# Altium PCB PCB3.PcbDoc
Units mil, origin at the board's own origin, x right, y up, seen from the top; angles counter-clockwise.
Board outline 3080 x 3661.42 mil, 2 copper layers (Top Layer, Bottom Layer); 33 components, 39 nets, 131 pads, 39 vias.
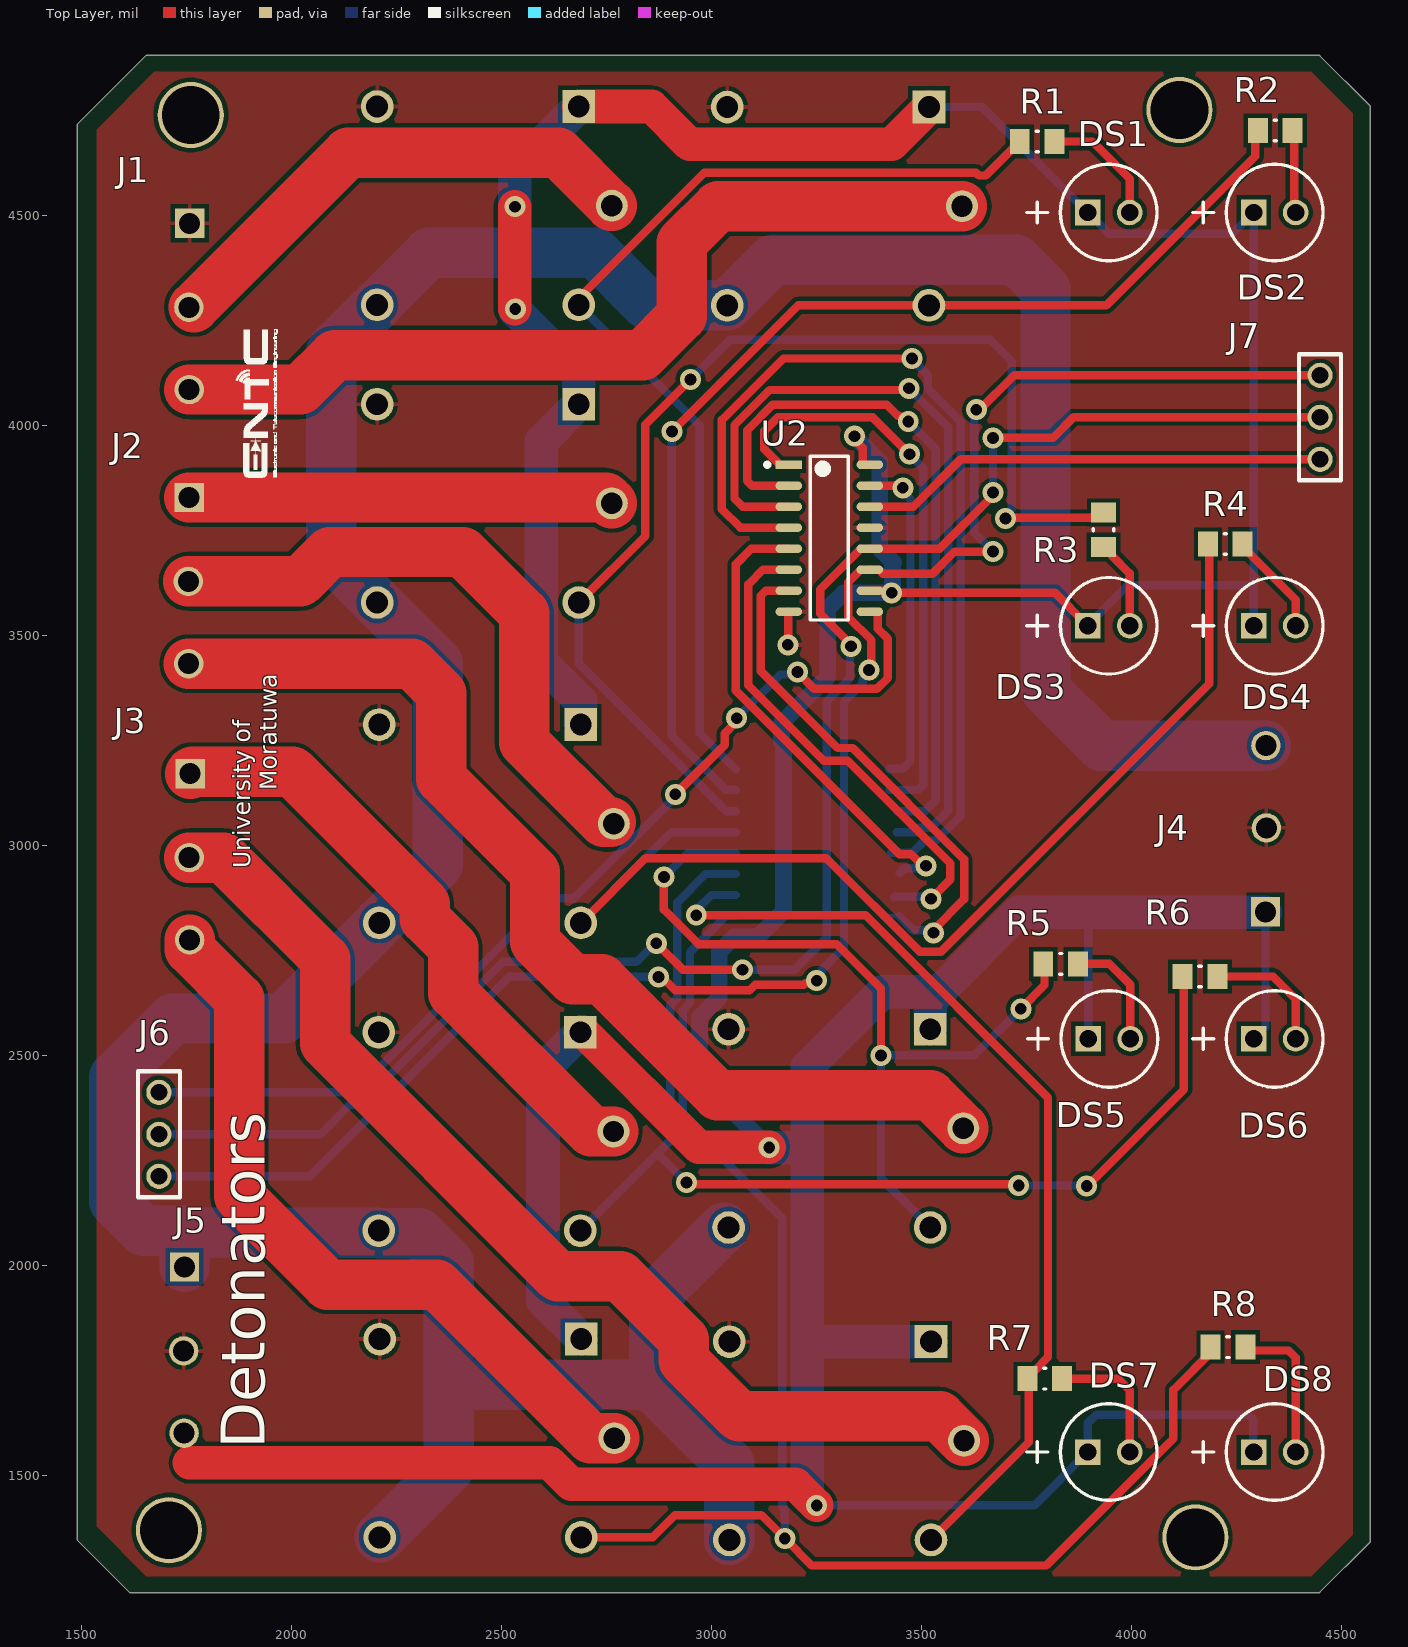
[diagram p0: Top Layer view]
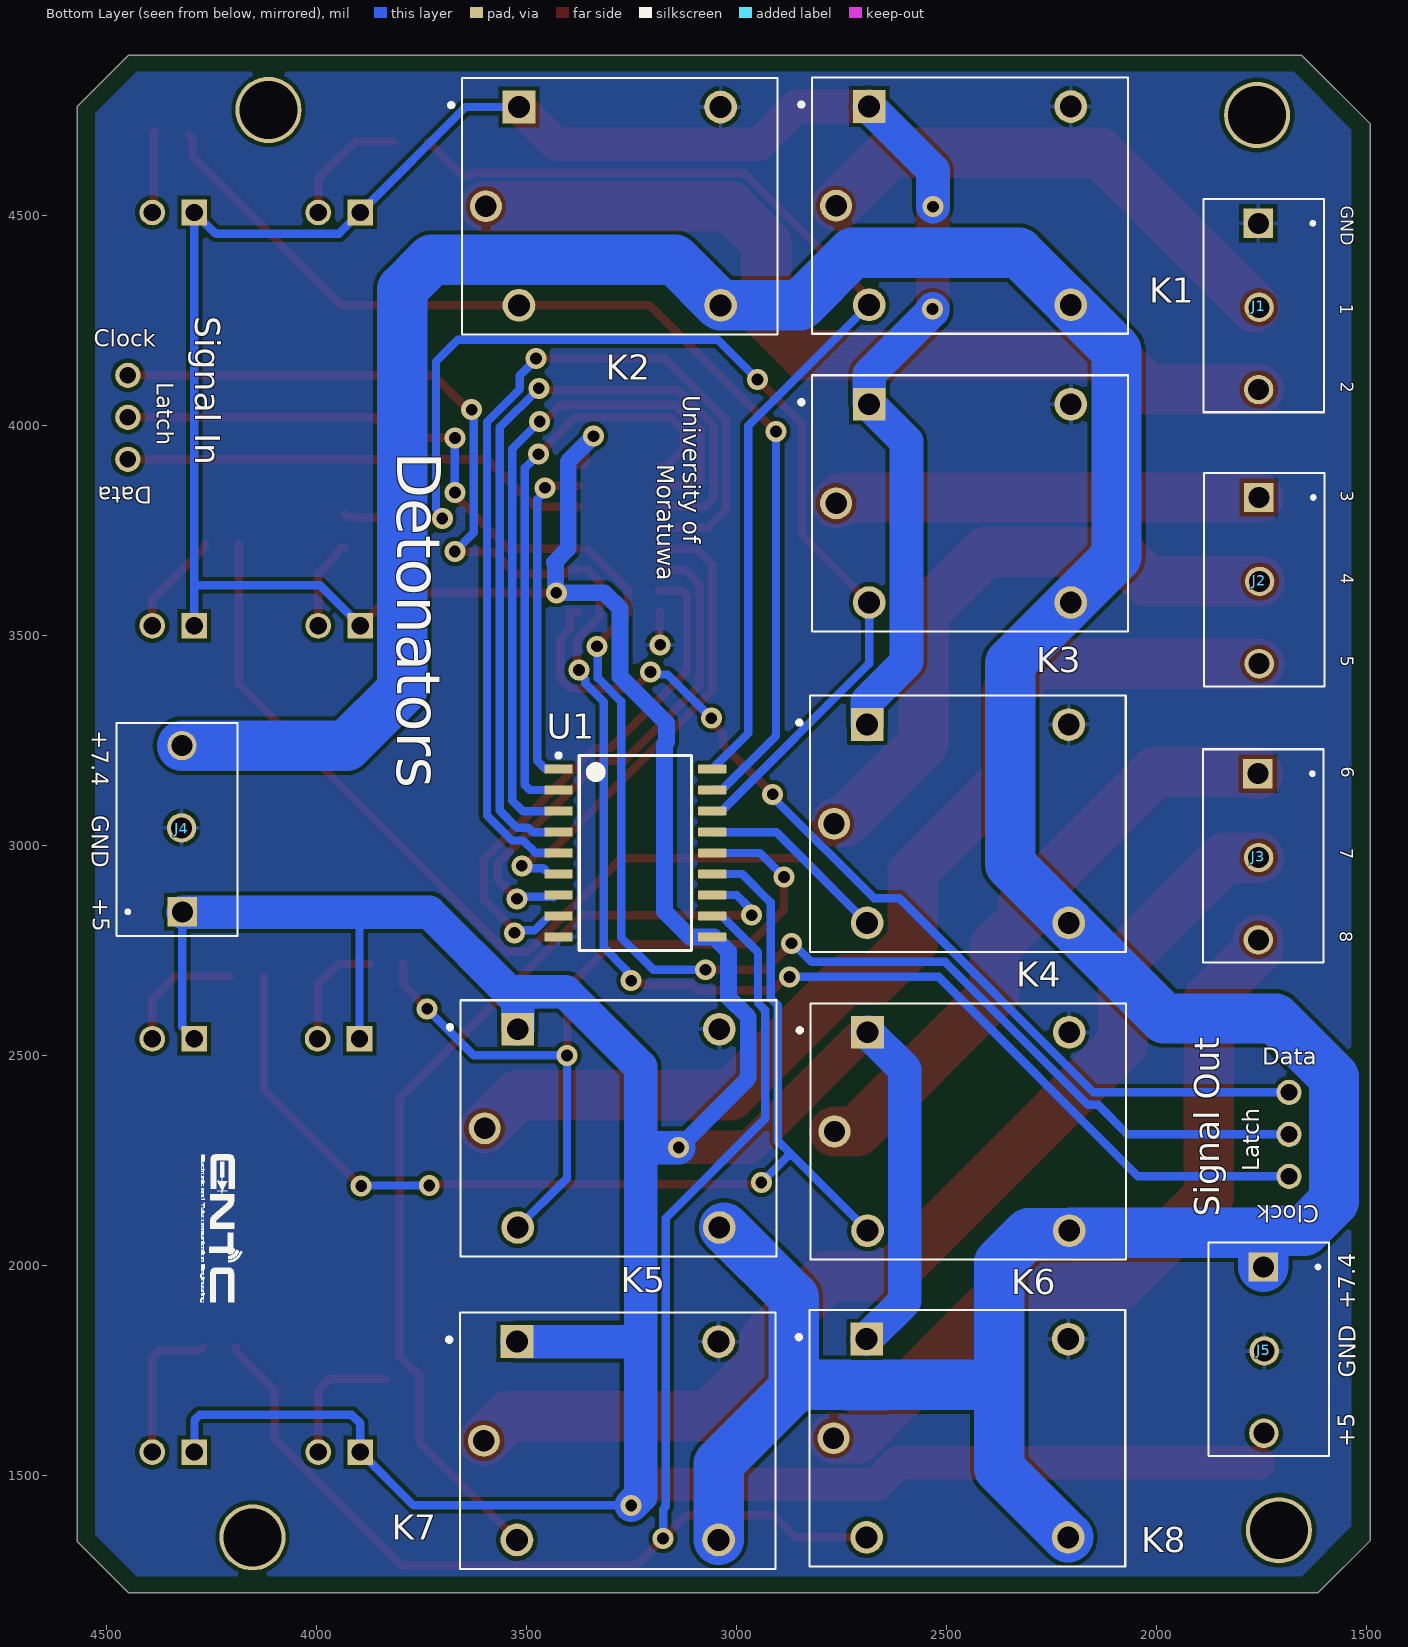
[diagram p1: Bottom Layer view, seen from below]
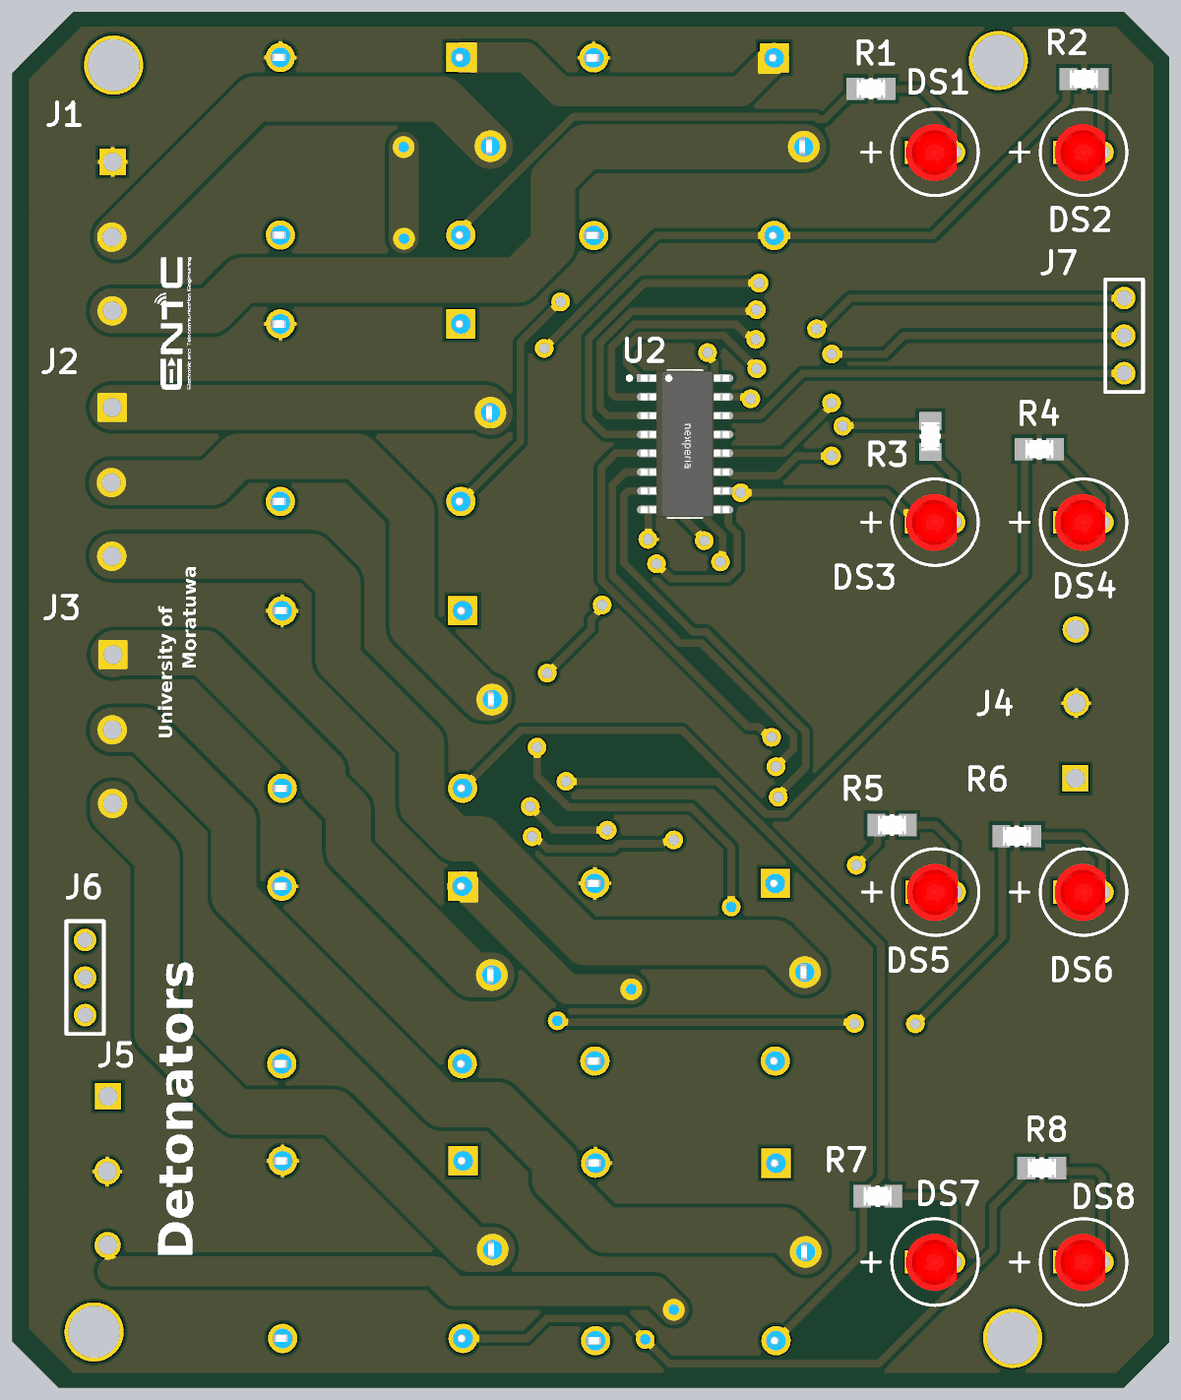
[diagram p2: 3D render of the assembled board from above, using the file's embedded part models]
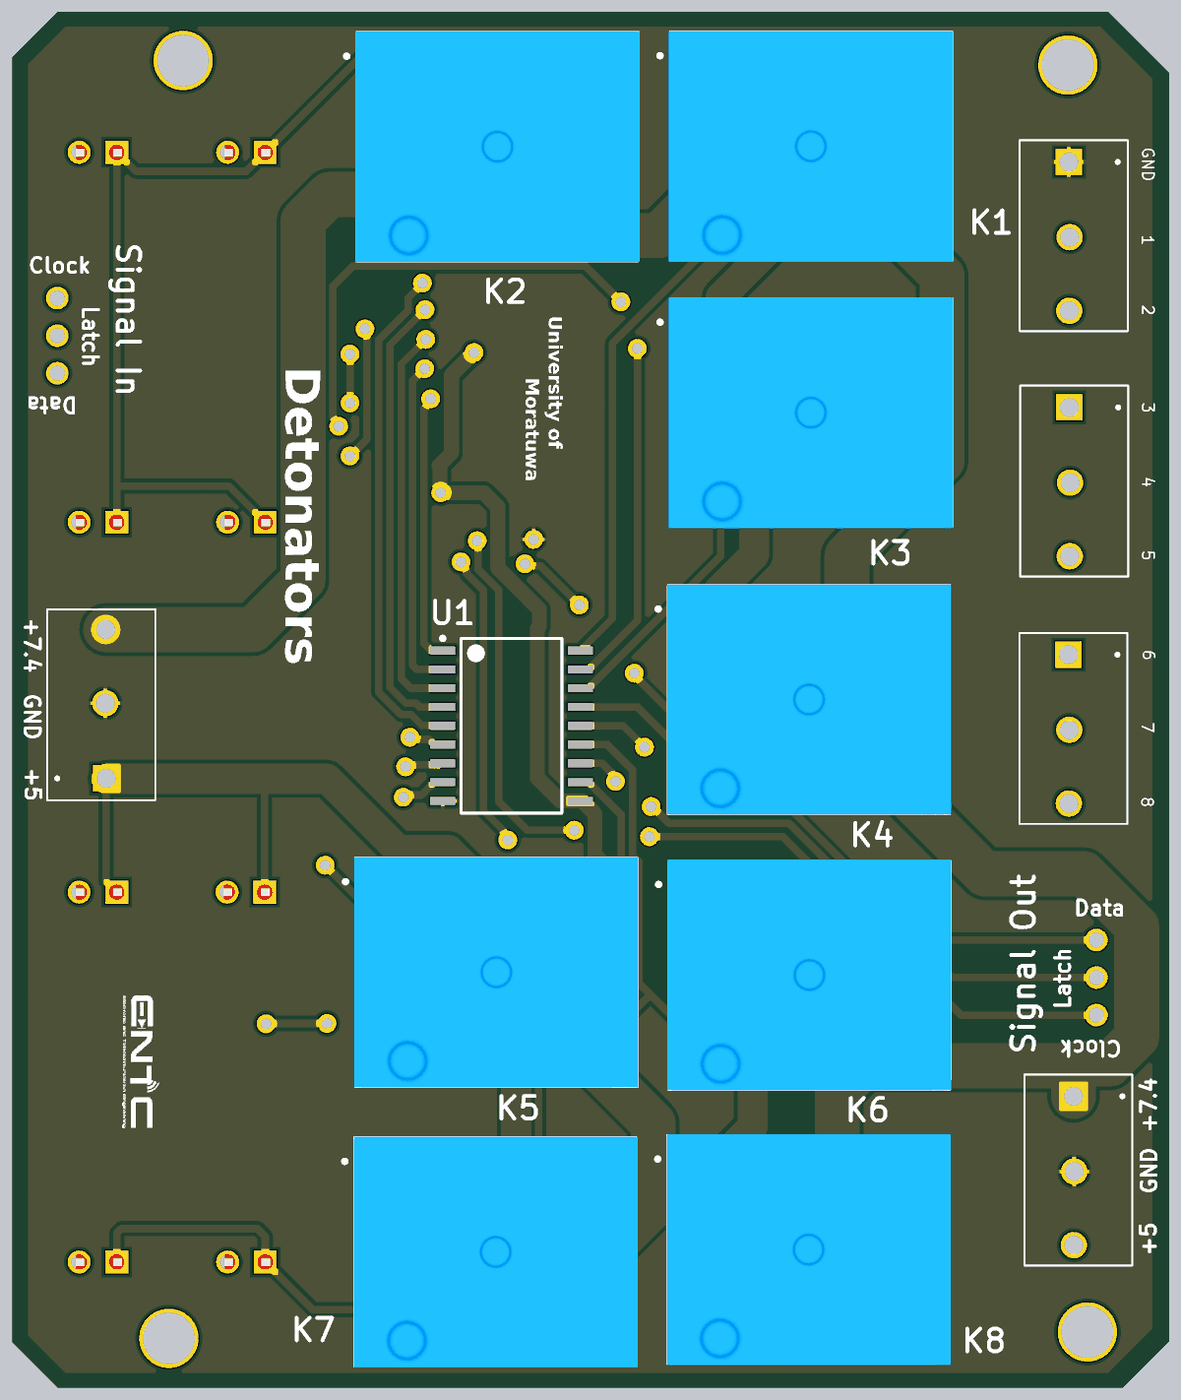
[diagram p3: 3D render of the assembled board from below, using the file's embedded part models]

## Layer stack, top to bottom
Top Solder: solder mask 0.4, Solder Resist, Dk 3.5
Top Layer: signal copper 1.4
Dielectric 1: dielectric 12.6, FR-4, Dk 4.8
Bottom Layer: signal copper 1.4
Bottom Solder: solder mask 0.4, Solder Resist, Dk 3.5

## Board outline
1490,1344.65 1614.17,1220.47 4448.82,1220.47 4570,1341.65 4570,4760.71 4448.82,4881.89 1653.54,4881.89 1490,4718.35

## Design rules (kind name [scope] priority, off if disabled: settings)
Clearance [All] p1: gap=10 ignorepadtopadclearanceinfootprint=TRUE
HoleSize [All] p1: absolutevalues=TRUE maxlimit=157.48 minlimit=0.98 maxpercent=80.000 minpercent=20.000
PolygonConnect [All] p1: connectstyle=Relief reliefconductorwidth=10 reliefentries=4 polygonreliefangle="90 Angle" airgapwidth=10
RoutingVias [All] p1: holewidth=28 width=50 viastyle="Through Hole" minholewidth=28 minwidth=50 maxholewidth=28 maxwidth=50
SilkToSolderMaskClearance [IsPad] p1: minsilkscreentomaskgap=9.8 clearancetoexposedcopper=TRUE
SolderMaskExpansion [All] p1: expansion=4 istentingtop=FALSE
SupplyNets "Schematic Supply Nets_2" [InNet('GND')] p1: voltage=0.000
SupplyNets "Schematic Supply Nets_1" [InNet('+7.4V')] p2: voltage=0.000
SupplyNets "Schematic Supply Nets" [InNet('+5')] p3: voltage=0.000
Width [All] p1: maxlimit=120 minlimit=10 preferedwidth=50 minimp=50.000000 maximp=50.000000 favimp=50.000000
28 further rules are at their usual default settings.

## Components (designator, comment, footprint, x,y, rotation, side; value= is the part's Value field where it differs from the comment)
DS1 "LED" "BIG RED LED" 3896.46,4507.87 r0 top locked
DS2 "LED" "BIG RED LED" 4291.73,4507.87 r0 top locked
DS3 "LED" "BIG RED LED" 3896.46,3523.62 r0 top locked
DS4 "LED" "BIG RED LED" 4291.73,3523.62 r0 top locked
DS5 "LED" "BIG RED LED" 3898.03,2539.37 r0 top locked
DS6 "LED" "BIG RED LED" 4291.73,2539.37 r0 top locked
DS7 "LED" "BIG RED LED" 3896.46,1555.12 r0 top locked
DS8 "LED" "BIG RED LED" 4291.73,1555.12 r0 top locked
J1 "3 pin connector" "3 PIN CONNECTOR" 1752.28,4297.05 r270 bottom
J2 "3 pin connector" "3 PIN CONNECTOR" 1751,3644 r270 bottom
J3 "3 pin connector" "3 PIN CONNECTOR" 1753.28,2986.17 r270 bottom
J4 "3 pin connector" "3 PIN CONNECTOR" 4325,3027 r90 bottom
J5 "3 pin connector" "3 PIN CONNECTOR" 1740,1811 r270 bottom
J6 "Signal Out" "3 pin header" 1684,2412 r0 top
J7 "Signal In" "3 pin header" 4450,3920 r180 top
K1 "5V ralay" RELAY_SRD-05VDC-SL-C 2444,4524 r180 bottom locked
K2 "5V ralay" RELAY_SRD-05VDC-SL-C 3278.16,4522.78 r180 bottom locked
K3 "5V ralay" RELAY_SRD-05VDC-SL-C 2444,3815 r180 bottom locked
K4 "5V ralay" RELAY_SRD-05VDC-SL-C 2448.84,3051.78 r180 bottom locked
K5 "5V ralay" RELAY_SRD-05VDC-SL-C 3281.16,2326.22 r180 bottom locked
K6 "5V ralay" RELAY_SRD-05VDC-SL-C 2447.84,2318.78 r180 bottom locked
K7 "5V ralay" RELAY_SRD-05VDC-SL-C 3283,1582 r180 bottom locked
K8 "5V ralay" RELAY_SRD-05VDC-SL-C 2450,1588 r180 bottom locked
R1 "220R" FP-CRCW0805-e3-IPC_A 3776,4677 r180 top
R2 "220R" FP-CRCW0805-e3-IPC_A 4343,4703 r180 top
R3 "220R" FP-CRCW0805-e3-IPC_A 3934,3752 r90 top
R4 "220R" FP-CRCW0805-e3-IPC_A 4224,3718 r180 top
R5 "220R" FP-CRCW0805-e3-IPC_A 3832,2718 r180 top
R6 "220R" FP-CRCW0805-e3-IPC_A 4164,2688 r180 top
R7 "220R" FP-CRCW0805-e3-IPC_A 3794,1730 r180 top
R8 "220R" FP-CRCW0805-e3-IPC_A 4230.61,1805 r180 top
U1 "ULN2803ADWR" DW0018A_L 3241,2982 r180 bottom locked
U2 "74HC595D,118" FP-SOT109-1-IPC_C 3281,3732 r0 top locked

## Footprints (in the part's own frame and the unit in brackets; to place one, negate y for a bottom-side part, rotate by r counter-clockwise, add the part's x,y. Pads: shape width x height; smd on the part's side, far side on the other; paste and mask are expansions set on the pad)
"3 PIN CONNECTOR" [mil]
  rect 70x70 hole 50: 1(-185,-5)
  round 70 hole 50: 2(15,-3) 3(211,-4)
  silkscreen extent -243,-136 265,152, body extent -282,-172 320,136, height 394
"3 pin header" [mil]
  round 60 hole 40: 1(0,0) 2(0,-100) 3(0,-200)
  silkscreen extent -50,-250 50,50
"BIG RED LED" [mm] "THD, 2-Leads, Body Dia 5.85mm"
  rect 1.55x1.55 hole 1.05: 1(0,0)
  round 1.55 hole 1.05: 2(2.54,0)
  silkscreen extent -3.68,-2.92 4.19,2.92, body extent -0.7,-1.94 2.79,1.91, height 23.39
DW0018A_L [mm] "SOIC, 18-Leads, Body 11.8x7.6mm, Pitch 1.27mm, IPC High Density"
  rrect18% 1.7x0.55 smd: 1(-4.65,5.08) 2(-4.65,3.81) 3(-4.65,2.54) 4(-4.65,1.27) 5(-4.65,0) 6(-4.65,-1.27) 7(-4.65,-2.54) 8(-4.65,-3.81) 9(-4.65,-5.08) 10(4.65,-5.08) 11(4.65,-3.81) 12(4.65,-2.54) 13(4.65,-1.27) 14(4.65,0) 15(4.65,1.27) 16(4.65,2.54) 17(4.65,3.81) 18(4.65,5.08)
  silkscreen extent -4.78,-5.9 3.4,6.03, body extent -3.8,-5.9 3.8,5.9, height 2.65
FP-CRCW0805-e3-IPC_A [mil]
  rect 47.5x59.38 smd paste+0 mask+0: 1(-41.37,0) 2(41.37,0)
  silkscreen extent -3,-25 3,25, body extent -85,-49 85,49, height 10
FP-SOT109-1-IPC_C [mil]
  rect 63.17x20.79 smd paste+0 mask+0: 1(-96.49,175)
  rrect100% 63.17x20.79 smd paste+0 mask+0: 2(-96.49,125) 3(-96.49,75) 4(-96.49,25) 5(-96.49,-25) 6(-96.49,-75) 7(-96.49,-125) 8(-96.49,-175) 9(96.49,-175) 10(96.49,-125) 11(96.49,-75) 12(96.49,-25) 13(96.49,25) 14(96.49,75) 15(96.49,125) 16(96.49,175)
  silkscreen extent -153,-195 45,195, body extent -132,-199 132,199, height 10
RELAY_SRD-05VDC-SL-C [mm]
  rect 1.98x1.98 / inner round 1.98 / far side rect 1.98x1.98 hole 1.32: A1(-6.1,6)
  round 1.98 hole 1.32: A2(-6.1,-6) NC(6.1,6) NO(6.1,-6)
  round 1.935 hole 1.29: COM(-8.1,0)
  silkscreen extent -10.3,-7.75 9.55,7.75, body extent -9.6,-7.8 9.6,7.8, height 15.8

## Part data
DS1 DS2 DS3 DS4 DS5 DS6 DS7 DS8: library part "big red led", "T-1 3/4 (5 mm) Diffused LED Lamp, 1.9 V, -40 to 100 degC, 2-Pin THD, RoHS, Bulk", Emitting Color=Red, Forward Current=25mA, Forward Voltage=2.4V, Manufacturer=Avago, Operating Temp Range=-40Cto100C, Operating Temperature Classification=Industrial, Package Description="2-Pin Through Hole LED, Dia 5.85 mm", Package Reference=HLMP-3301, Package Type=T-13/4, Power Dissipation=85W, Reverse Voltage=5V, Test Current (It)=10mA, Chip Material=GaP, Datasheet URL=http://www.avagotech.com/docs/AV02-1558EN, Datasheet Version=03/2015, DELETED=Compliant, Dominant Wave Length=626nm, High Brightness=No, Lens Dimensions=5.08x5.08x8.3mm, Lens Type=ColoredDiffused, Lum Intensity=5.4mcd, Luminous Intensity=5.4mcd, Main Category=StandardLED, Manufacturer URL=http://www.avagotech.com/, Mounting=ThroughHole, Mounting Technology=ThroughHole, Number of  Elements=1, Packaging=TapeandReel, Peak Wavelength=635nm, Pin Count=2, Product Depth (mm)=6.1mm, Product Height (mm)=9.19mm, Product Length (mm)=6.1mm, Rad Hardened=No, Shape Type=Circular, Type=Uni-Color, Viewing Angle=60deg
J1 J2 J3 J4 J5: "3P,STRAIGHT,SIDE ENTRY,3.5MM", Package=None, Availability=Unavailable, MF="TE Connectivity", MP=1546551-3, Price=None, SnapEDA_Link=https://www.snapeda.com/parts/1546551-3/TE%20Connectivity%20AMP%20Connectors/view-part/2360652/?ref=snap
J6 J7: library part "3 pin header", "3P,STRAIGHT,SIDE ENTRY,3.5MM", Package=None, Availability=Unavailable, MF="TE Connectivity", MP=1546551-3, Price=None, SnapEDA_Link=https://www.snapeda.com/parts/1546551-3/TE%20Connectivity%20AMP%20Connectors/view-part/2360652/?ref=snap
K1 K2 K3 K4 K5 K6 K7 K8: "5V Trigger Relay Module For Arduino And Raspberry Pi 5V Trigger Relay Module For Arduino And Raspberry Pi", Package="NON STANDARD-5 Songle Relay", Availability="Not in stock", Check_prices=https://www.snapeda.com/parts/SRD-05VDC-SL-C/Songle+Relay/view-part/?ref=eda, MF="Songle Relay", MP=SRD-05VDC-SL-C, Price=None, SnapEDA_Link=https://www.snapeda.com/parts/SRD-05VDC-SL-C/Songle+Relay/view-part/?ref=snap
R1 R2 R3 R4 R5 R6 R7 R8: library part CMP-2001-03682-2, "RES Thick Film, 220Ω, 1%, 0.125W, 100ppm/°C, 0805", Case Code (Imperial)=0805, Case Code (Metric)=2012, JLC=C17540, Max Operating Temperature=155°C, Max Power Dissipation=125mW, Min Operating Temperature=-55°C, Package Quantity=10, Temperature Coefficient=100ppm/°C, Tolerance=1%, Voltage Rating=150V, Case/Package=0805, Composition="Thick Film", Contact Plating=Tin, Depth=1.25mm, Features="Automotive AEC-Q200", Height=0.45mm, Lead Free="Lead Free", Length=2mm, Military Standard=Not, Mount="Surface Mount", Number of Terminations=2, Packaging="Tape and Reel", Power Rating=125mW, Radiation Hardening=No, Resistance=220R, Termination=SMD/SMT, Voltage Rating (DC)=150V, Weight=0.000194oz, Width=0.049inch
U1: library part CMP-2000-07354-1, "Darlington Transistor Array, -40 to 85 degC, 18-Pin SOIC (DW), Green (RoHS & no Sb/Br), Tape and Reel", JLC=C845537, Manufacturer="Texas Instruments", Package / Case="18-SOIC(0.295\",7.50mmWidth)", Package Description="18-Pin Plastic Small Outline, Body 11.55 x 7.5 mm, Pitch 1.27 mm", Package Reference=DW18, Package Version="4040000-3/G, 01/2011", PartNumber=ULN2803A, Standard Package=1, Supplier Device Package=18-SOIC, Voltage - Supply=5V, Category=IntegratedCircuits(ICs), Datasheet URL=http://www.ti.com/lit/ds/symlink/uln2803a.pdf, Datasheet Version="Rev. G, 01/2015", Dynamic Catalog=DarlingtonArrays, Family=Interface-Drivers,Receivers,Transceivers, IR Max=50uA, Manufacturer URL=http://www.ti.com/, Mounting Technology=SurfaceMount, Mounting Type=SurfaceMount, Number of Drivers/Receivers=8/0, Other Names=296-15777-6, Package URL=http://www.ti.com/lit/ml/mpds172a/mpds172a.pdf, Packaging=Digi-Reel®, Protocol=-, Series=-, Type=DarlingtonArray, VF=1.7V
U2: library part CMP-14351-000006-1, "IC SHIFT REGISTER 8BIT 16SOIC", JLC=C5947, RoHS Compliant=Yes

## Free pads (board coordinates)
  round 157.48 hole 137.8: 1(1760,4740) 2(4115,4752) 3(4153,1352) 4(1708,1369)

## Via types
v1: diameter 50, hole 28, Top Layer to Bottom Layer, 39 vias

## Nets (pads, with @x,y where several pads share a name; then routed paths per layer and width w, separated by ;. In a path a pad name is that pad's centre, name@x,y a point inside that pad or via, vN(x,y) a via of type N, cw(c..) or ccw(c..) an arc to the next point about the centre after c; other vN are vias at no path point)
+5: DS1.1 DS2.1 DS3.1 DS4.1 DS5.1 DS6.1 DS7.1 DS8.1 J4.1 J5.3 K1.A1 K2.A1 K3.A1 K4.A1 K5.A1 K6.A1 K7.A1 K8.A1 U1.10 U2.10 U2.16 | length 15221
  Top Layer w20: v1(3341,3975) 3341,3966.88 3360.49,3947.39 3360.49,3907.36 3360.85,3907 U2.16 ; U2.10 3377.64,3606.85 3424.57,3606.85 v1(3429.42,3602) 3818.08,3602 DS3.1
  Top Layer w80: 1757,1530 2614.44,1530 2666.44,1478 3201,1478 v1(3251,1428) ; v1@2532,4279 v1(2532,4521.76) ; K1.A1 2858.1,4760.22 2948.3,4670.02 3429.34,4670.02 K2.A1 ; K6.A1 2696,2555 2970.29,2280.71 v1(3137.85,2280.71)
  Bottom Layer w20: v1(3251,1428) 3769.34,1428 DS7.1 3896.46,1623.74 3916.59,1643.88 4279.37,1643.88 4291.09,1632.16 4291.09,1555.76 DS8.1 ; K2.A1 3645.33,4759 DS1.1 3946.97,4457.36 4238.36,4457.36 4239,4458 4241.86,4458 DS2.1 4291.73,3620 ; 3888,2841 3898.03,2830.97 DS5.1 ; DS3.1 3992.83,3620 4291.73,3620 ; DS6.1 4320,2567.64 J4.1 ; DS4.1 4291.73,3620
  Bottom Layer w40: v1@3136.3,2282.27 2972.02,2446.54 2972.02,2591.01 3019,2637.99 3019,2747.36 3053.64,2782 U1.10 3111,2782 3171.88,2842.88 3171.88,3241.34 3167,3246.22 3167,3291.78 3277.34,3402.12 3277.34,3565.12 3314.22,3602 v1(3429.42,3602) 3431.33,3603.91 3431.33,3671.16 3434.09,3673.91 3401,3707 3401,3914.79 3341,3974.79 v1(3341,3975)
  Bottom Layer w80: v1(2532,4521.76) 2532,4608.06 K1.A1 ; v1(2533,4278) 2533,4273.69 2684.16,4122.53 K3.A1 2595.18,3962.24 2595.18,3437.26 2689,3343.44 K4.A1 ; K6.A1 2599.02,2466.02 2599.02,1915.35 K8.A1 ; v1@3138.21,2280.35 3228.49,2280.35 ; v1(3251,1428) 3228.49,1450.51 3228.49,1824 ; K5.A1 3521.32,2630.32 3542.42,2651.42 ; K7.A1 3234.27,1818.22 3228.49,1824 ; J4.1@4319,2841 3888,2841 3732,2841 3542.42,2651.42 ; 3228.49,1824 3228.49,2280.35 ; 3228.49,2280.35 3228.49,2472.49 3407.42,2651.42 3542.42,2651.42
+7.4V: J4.3 J5.1 K1.NO K2.NO K3.NO K4.NO K5.NO K6.NO K7.NO K8.NO | length 9059.4
  Bottom Layer w120: J5.1 1745,2077.56 ; K6.NO@2202.68,2077.56 1745,2077.56 ; K6.NO@2207.68,2076.78 2303.71,2076.78 2374,2006.49 2374,1715.24 ; K8.NO 2374,1515.94 2374,1715.24 ; 2855.29,1706.49 2846.54,1715.24 2736.74,1715.24 2735.72,1714.22 2644.59,1714.22 2643.57,1715.24 2374,1715.24 ; 2863.78,1737.22 2863.78,1923.78 K5.NO@3030,2090 ; 2865.29,1704.71 3042.84,1527.16 K7.NO ; J4.3 3929,3238 3795.94,3371.06 3795.94,4325.24 3725.65,4395.54 3146.98,4395.54 K2.NO 2849.03,4286.56 2723.84,4411.76 2327.82,4411.76 2094.87,4178.8 2094.87,3687.76 K3.NO 2348,3434.62 2348,2954.87 K4.NO 1981.13,2588 1717,2588 1577,2448 1577,2152.85 1647.29,2082.56 1740,2082.56 1745,2077.56
GND: J1.1 J4.2 J5.2 K1.NC K2.NC K3.NC K4.NC K5.NC K6.NC K7.NC K8.NC U1.9 U2.8 U2.13 | length 80.6
  Top Layer w20: v1(3182,3478) 3183.25,3479.25 3183.25,3556.64 3183.62,3557 U2.8
NetDS1_2: DS1.2 R1.1 | length 296.4
  Top Layer w20: R1.1 3908,4677 3996.46,4588.54 DS1.2
NetDS2_2: DS2.2 R2.1 | length 198.2
  Top Layer w20: R2.1 4388.05,4699.32 4388.05,4511.55 DS2.2
NetDS3_2: DS3.2 R3.1 | length 216.4
  Top Layer w20: R3.1 3939.94,3710.63 3953.69,3696.88 3953.69,3690.94 3996.46,3648.17 DS3.2
NetDS4_2: DS4.2 R4.1 | length 246.7
  Top Layer w20: R4.1 4265.37,3712.06 4391.73,3585.7 DS4.2
NetDS5_2: DS5.2 R5.1 | length 274.1
  Top Layer w20: R5.1 3948.28,2718 3998.03,2668.25 DS5.2
NetDS6_2: DS6.2 R6.1 | length 303.5
  Top Layer w20: R6.1 4338,2688 4391.73,2634.27 DS6.2
NetDS7_2: DS7.2 R7.1 | length 319.9
  Top Layer w20: R7.1 3969,1730 3996.46,1702.54 DS7.2
NetDS8_2: DS8.2 R8.1 | length 355.1
  Top Layer w20: R8.1 4279.99,1797 4375,1797 4391.73,1780.27 DS8.2
NetJ1_2: J1.2 K1.COM | length 1200.5
  Top Layer w120: J1.2@1767.05,4282.05 2135,4650 2635.68,4650 2761.68,4524 K1.COM
NetJ1_3: J1.3 K2.COM | length 2123.9
  Top Layer w120: J1.3 2020.86,4086.05 2102.81,4168 2836,4168 2929.02,4261.02 2929.02,4435.51 3016.29,4522.78 K2.COM
NetJ2_1: J2.1 K3.COM | length 1012.7
  Top Layer w120: J2.1 2748.9,3829 K3.COM
NetJ2_2: J2.2 K4.COM | length 1481.1
  Top Layer w120: J2.2 2021,3629 2091,3699 2408,3699 2554,3553 2554,3246.05 2744.05,3056 K4.COM@2760,3056
NetJ2_3: J2.3 K5.COM | length 2519.8
  Top Layer w120: J2.3 2286.71,3433 2357,3362.71 2357,3159 2580.02,2935.98 2580.02,2770.42 2669.23,2681.21 2738.74,2681.21 3014.95,2405 3521.28,2405 K5.COM
NetJ3_1: J3.1 K6.COM | length 1450.7
  Top Layer w120: J3.1 1763.12,3176 2002.36,3176 2317.66,2860.7 2317.66,2825.34 2385,2758 2385,2648 2714.22,2318.78 K6.COM
NetJ3_2: J3.2 K7.COM | length 2567.9
  Top Layer w120: J3.2 1837.83,2971.17 2080,2729 2080,2528.57 2634.99,1973.58 2783.63,1973.58 2933.87,1823.35 2933.87,1773.08 3066.95,1640 3543.9,1640 K7.COM
NetJ3_3: J3.3 K8.COM | length 1791.8
  Top Layer w120: J3.3 1757.28,2752.72 1875,2635 1875,2165 2086,1954 2346,1954 2712,1588 K8.COM
NetJ6_1: J6.1 U2.9 | length 2388.5
  Top Layer w20: v1(2914,3122) 3031.79,3239.79 3031.79,3266.67 3060.25,3295.14 v1(3060.25,3303.25) ; v1(3205,3413) 3245,3373 3393.9,3373 3420.26,3399.36 3420.26,3492.49 3396.14,3516.61 3396.14,3556.64 3395.78,3557 U2.9
  Bottom Layer w20: J6.1 2150,2412 2612.54,2874.54 2672.65,2874.54 2914,3115.89 v1(2914,3122) ; v1(3060.25,3303.25) 3164.26,3407.26 3199.26,3407.26 v1(3205,3413)
NetJ6_2: J6.2 J7.2 U2.12 | length 4161.5
  Top Layer w10: U2.12@3356.3,3707 U2.12
  Top Layer w20: v1(2869,2767) 2932,2704 v1(3074,2704) ; v1(3332.34,3474.34) 3332.34,3479.07 3259,3552.41 3259,3609.7 U2.12@3356.3,3707 ; U2.12 3544,3707 3670.94,3833.94 v1(3670.94,3841) ; v1(3670.94,3970.94) 3813.73,3970.94 3862.78,4020 J7.2
  Bottom Layer w20: J6.2 2068.35,2312 2138.35,2382 2162.43,2382 2503.26,2722.84 2821.24,2722.84 2865.4,2767 v1(2869,2767) ; v1(3074,2704) 3198,2704 3274.93,2780.93 3274.93,3343.15 3330.26,3398.47 3330.26,3472.26 v1(3332.34,3474.34) ; v1(3670.94,3841) v1(3670.94,3970.94)
NetJ6_3: J6.3 J7.3 U2.11 | length 4407
  Top Layer w10: U2.11@3356.3,3657 U2.11
  Top Layer w20: v1(2874,2687) 2882.12,2687 2914.12,2655 3090.86,2655 3103.86,2668 3219.79,2668 3224.05,2672.26 3245.26,2672.26 v1(3251,2678) ; U2.11@3356.3,3657 3325.91,3626.61 3325.91,3544.41 3381,3489.32 3381,3423.74 v1(3375.26,3418) ; U2.11 3398.89,3657 3408.52,3647.38 3526.8,3647.38 3579.43,3700 v1(3671,3700) ; v1(3631,4038) 3639.12,4038 3721.12,4120 J7.3
  Bottom Layer w20: J6.3 2043.35,2212 2518.35,2687 v1(2874,2687) ; v1(3251,2678) 3251,2686.12 3262.89,2698.01 3262.89,2703.89 3316,2757 3316,3341.79 3360.26,3386.05 3360.26,3394.88 3375.26,3409.88 v1(3375.26,3418) ; v1(3631,4038) 3625.94,4032.94 3625.94,3745.06 v1(3671,3700)
NetJ7_1: J7.1 U2.14 | length 1126.9
  Top Layer w10: J7.1@4450,3914.64 J7.1
  Top Layer w20: U2.14 3481,3807 3594,3920 4444.64,3920 J7.1@4450,3914.64
NetK1_A2: K1.A2 R1.2 U1.18 | length 2487.3
  Top Layer w20: K1.A2 2684.16,4303.46 2704.93,4324.24 2704.93,4324.55 2983.16,4602.78 3630.19,4602.78 3637.02,4595.96 3653.58,4595.96 R1.2
  Bottom Layer w20: K1.A2 2972,3999.94 2972,3267.93 U1.18
NetK2_A2: K2.A2 R2.2 U1.17 | length 2646.6
  Top Layer w20: v1(2906,3986) 3206.56,4286.56 K2.A2 3940.56,4286.56 4295.91,4641.91 4295.91,4685.23 R2.2@4304,4693.32
  Bottom Layer w20: v1(2906,3986) 2906,3261.29 3034.46,3132.83 3057.1,3132.83 U1.17
NetK3_A2: K3.A2 R3.2 U1.16 | length 2750.8
  Top Layer w20: K3.A2 2842.9,3737.52 2842.9,4002.9 v1(2950,4110) ; v1(3700.94,3779) 3702.33,3780.39 3903.74,3780.39 3905.04,3781.68 3925.3,3781.68 R3.2@3934,3790.39
  Bottom Layer w20: K3.A2 2684.16,3433.13 3035.29,3082 U1.16 ; v1(2950,4110) 3045,4205 3663.64,4205 3715.94,4152.69 3715.94,3802.12 3700.94,3787.12 v1(3700.94,3779)
NetK4_A2: K4.A2 R4.2 U1.15 | length 2708.8
  Top Layer w20: K4.A2 2843.44,2970 3273.43,2970 3496.43,2747 3547.64,2747 4185.61,3384.97 R4.2@4185.61,3718
  Bottom Layer w20: K4.A2 2905.44,3032 2963.91,3032 U1.15
NetK5_A2: K5.A2 R5.2 U1.14 | length 1994.4
  Top Layer w20: v1(2887,2925) 2887,2847.36 2969.23,2765.13 3298.22,2765.13 3404,2659.35 v1(3404,2500) ; v1(3737,2611) 3793.61,2667.61 R5.2@3793.61,2718
  Bottom Layer w20: v1(2887,2925) 2944,2982 U1.14 ; K5.A2 3404,2207.32 v1(3404,2500) 3626,2500 v1(3737,2611)
NetK6_A2: K6.A2 R6.2 U1.13 | length 2698.3
  Top Layer w20: v1(2941,2197) 2944.5,2193.5 3728.5,2193.5 v1(3732,2190) ; v1(3894,2189) 3895.62,2189 4125.61,2418.99 R6.2@4125.61,2688
  Bottom Layer w20: K6.A2 2865.72,2260.28 ; v1(2941,2197) 2877.72,2260.28 2865.72,2260.28 ; U1.13 2986.36,2932 2919,2864.64 2919,2636.98 2902.02,2620.01 2902.02,2296.58 2871.72,2266.28 2865.72,2260.28 ; v1(3732,2190) 3893,2190 v1(3894,2189)
NetK7_A2: K7.A2 R7.2 U1.12 | length 2310.7
  Top Layer w20: v1(2964,2834) 3367,2834 3802,2399 3802,1781.26 3769.28,1748.54 3764.32,1748.54 3755.61,1739.84 3755.61,1578.24 K7.A2
  Bottom Layer w20: v1(2964,2834) 2969.74,2839.74 2969.74,2851.74 3000,2882 U1.12
NetK8_A2: K8.A2 R8.2 U1.11 | length 3511.6
  Top Layer w20: K8.A2 2860.07,1351.78 2913.04,1404.76 3119.24,1404.76 v1(3175,1349) 3239,1285 3797.77,1285 4100.45,1587.68 4100.45,1703.38 4192.23,1795.16 R8.2@4192.23,1805
  Bottom Layer w20: U1.11 3035.29,2832 2949,2745.71 2949,2624.56 2932.02,2607.58 2932.02,2348.98 3168.49,2112.51 3168.49,1425.65 3175,1419.15 v1(3175,1349)
NetU1_1: U1.1 U2.15 | length 797.2
  Top Layer w20: U2.15 3451,3857 v1(3456,3852)
  Bottom Layer w20: U1.1 3424.9,3182.83 3455.8,3182.83 3474.42,3201.44 3474.42,3825.46 3456,3843.88 v1(3456,3852)
NetU1_2: U1.2 U2.1 | length 1399.6
  Top Layer w10: U2.1@3163.32,3907 U2.1
  Top Layer w20: U2.1@3163.32,3907 3126,3944.32 3126,3987.29 3158.71,4020 3384,4020 v1(3472,3932)
  Bottom Layer w20: U1.2@3424.22,3132.15 3492.7,3132.15 3504.42,3143.87 3504.42,3899.58 v1(3472,3932)
NetU1_3: U1.3 U2.2 | length 1688.9
  Top Layer w10: v1@3463.3,4004.3 v1(3469,4010)
  Top Layer w20: U2.2 3096.89,3857 3085.18,3868.72 3085.18,3988.9 3146.28,4050 3417.59,4050 3444.4,4023.19 3447.7,4023.19 3463.3,4007.59 v1@3463.3,4004.3
  Bottom Layer w20: U1.3@3442.57,3082 3509.28,3082 3534.42,3107.13 3534.42,3944.58 v1(3469,4010)
NetU1_4: U1.4 U2.3 | length 1953.3
  Top Layer w20: U2.3 3074.36,3807 3055.18,3826.18 3055.18,4001.33 3138.85,4085 3467,4085 v1(3471,4089)
  Bottom Layer w20: U1.4@3441,3032 3485.93,3032 3495.93,3042 3522.54,3042 3564.42,3083.88 3564.42,3995.58 v1(3471,4089)
NetU1_5: U1.5 U2.4 | length 2249.3
  Top Layer w10: U2.4@3160.4,3757 U2.4
  Top Layer w20: U2.4@3160.4,3757 3069,3757 3025.18,3800.82 3025.18,4013.75 3171.43,4160 v1(3478,4160)
  Bottom Layer w10: U1.5 U1.5@3428.17,2986.1
  Bottom Layer w20: U1.5@3428.17,2982.83 3479.19,2982.83 3508.36,3012 3534.96,3012 3594.42,3071.46 3594.42,4009.22 3516,4087.64 3516,4120.22 3478,4158.22 v1(3478,4160)
NetU1_6: U1.6 U2.5 | length 1138.4
  Top Layer w20: U2.5 3095.43,3707 3058,3669.57 3058,3441.61 3058,3369.15 3447.61,2979.54 3475.28,2979.54 3503.35,2951.47 v1(3511.47,2951.47)
  Bottom Layer w20: U1.6@3449.06,2934.35 3460.44,2945.73 3505.73,2945.73 v1(3511.47,2951.47)
NetU1_7: U1.7 U2.6 | length 1201.6
  Top Layer w20: U2.6 3122.93,3657 3088,3622.07 3088,3454.04 3088,3381.57 3267.31,3202.27 3324.31,3202.27 3569.5,2957.07 3569.5,2919.5 v1(3523,2873)
  Bottom Layer w20: U1.7@3436,2877 3437,2878 3518,2878 v1(3523,2873)
NetU1_8: U1.8 U2.7 | length 1247.9
  Top Layer w20: U2.7 3129.72,3607 3118,3595.28 3118,3415 3300.73,3232.27 3336.73,3232.27 3602,2967 3602,2872.18 3529,2799.18 v1(3529,2792)
  Bottom Layer w10: U1.8 U1.8@3446.71,2832
  Bottom Layer w20: U1.8@3446.71,2832 3480.97,2797.74 3523.26,2797.74 v1(3529,2792)

## Polygon pours and split planes (outlines as drawn)
GND on Bottom Layer "NONET_L-01_P-001" (solid, remove dead copper, pour order 1): 1535.43,4704.72 1673.23,4842.52 4429.13,4842.52 4527.56,4744.09 4527.56,1358.27 4429.13,1259.84 1653.54,1259.84 1535.43,1377.95
GND on Top Layer "NONET_L-01_P-001" (solid, remove dead copper, pour order 0): 1535.43,4704.72 1673.23,4842.52 4429.13,4842.52 4527.56,4744.09 4527.56,1358.27 4429.13,1259.84 1653.54,1259.84 1535.43,1377.95

## Silkscreen, mask and mechanical layers (free items; w line width, h text height)
Top Overlay:
  drawing of 32 lines, arcs and shapes, not listed
  text "Moratuwa" at 1979.03,3132 h70 r90
  text "University of" at 1915.78,2946.04 h70 r90
  text "Detonators" at 1970.2,1562.89 h180 r90
Bottom Overlay:
  drawing of 32 lines, arcs and shapes, not listed
  text "GND" at 1561,4524 h30 r90
  text "1" at 1562,4291 h30 r90
  text "Clock" at 4531,4188 h40
  text "2" at 1561,4105 h30 r90
  text "Latch" at 4381,4104 h40 r90
  text "University of" at 3141.78,4072.96 h70 r90
  text "Detonators" at 3842.2,3938.11 h180 r90
  text "Moratuwa" at 3203.03,3908 h70 r90
  text "Data" at 4392,3855 h40 r180
  text "3" at 1561,3845 h30 r90
  text "4" at 1561,3648 h30 r90
  text "5" at 1561,3452 h30 r90
  text "+7.4" at 4536,3274 h40 r90
  text "6" at 1559,3187 h30 r90
  text "GND" at 4536,3072 h40 r90
  text "7" at 1562,2994 h30 r90
  text "+5" at 4534,2875 h40 r90
  text "8" at 1563,2796 h30 r90
  text "Data" at 1748,2478 h40
  text "Latch" at 1755,2224 h40 r270
  text "Clock" at 1612,2143 h40 r180
  text "+7.4" at 1526,1895 h40 r270
  text "GND" at 1525,1732 h40 r270
  text "+5" at 1527,1567 h40 r270
Mechanical 15:
  the board outline again, w10